# Altium PCB PCB.PcbDoc
Units mm, origin at the board's own origin, x right, y up, seen from the top; angles counter-clockwise.
Board outline 143.25 x 85.22 mm, 2 copper layers (Top Layer, Bottom Layer); 18 components, 25 nets, 77 pads, 0 vias.
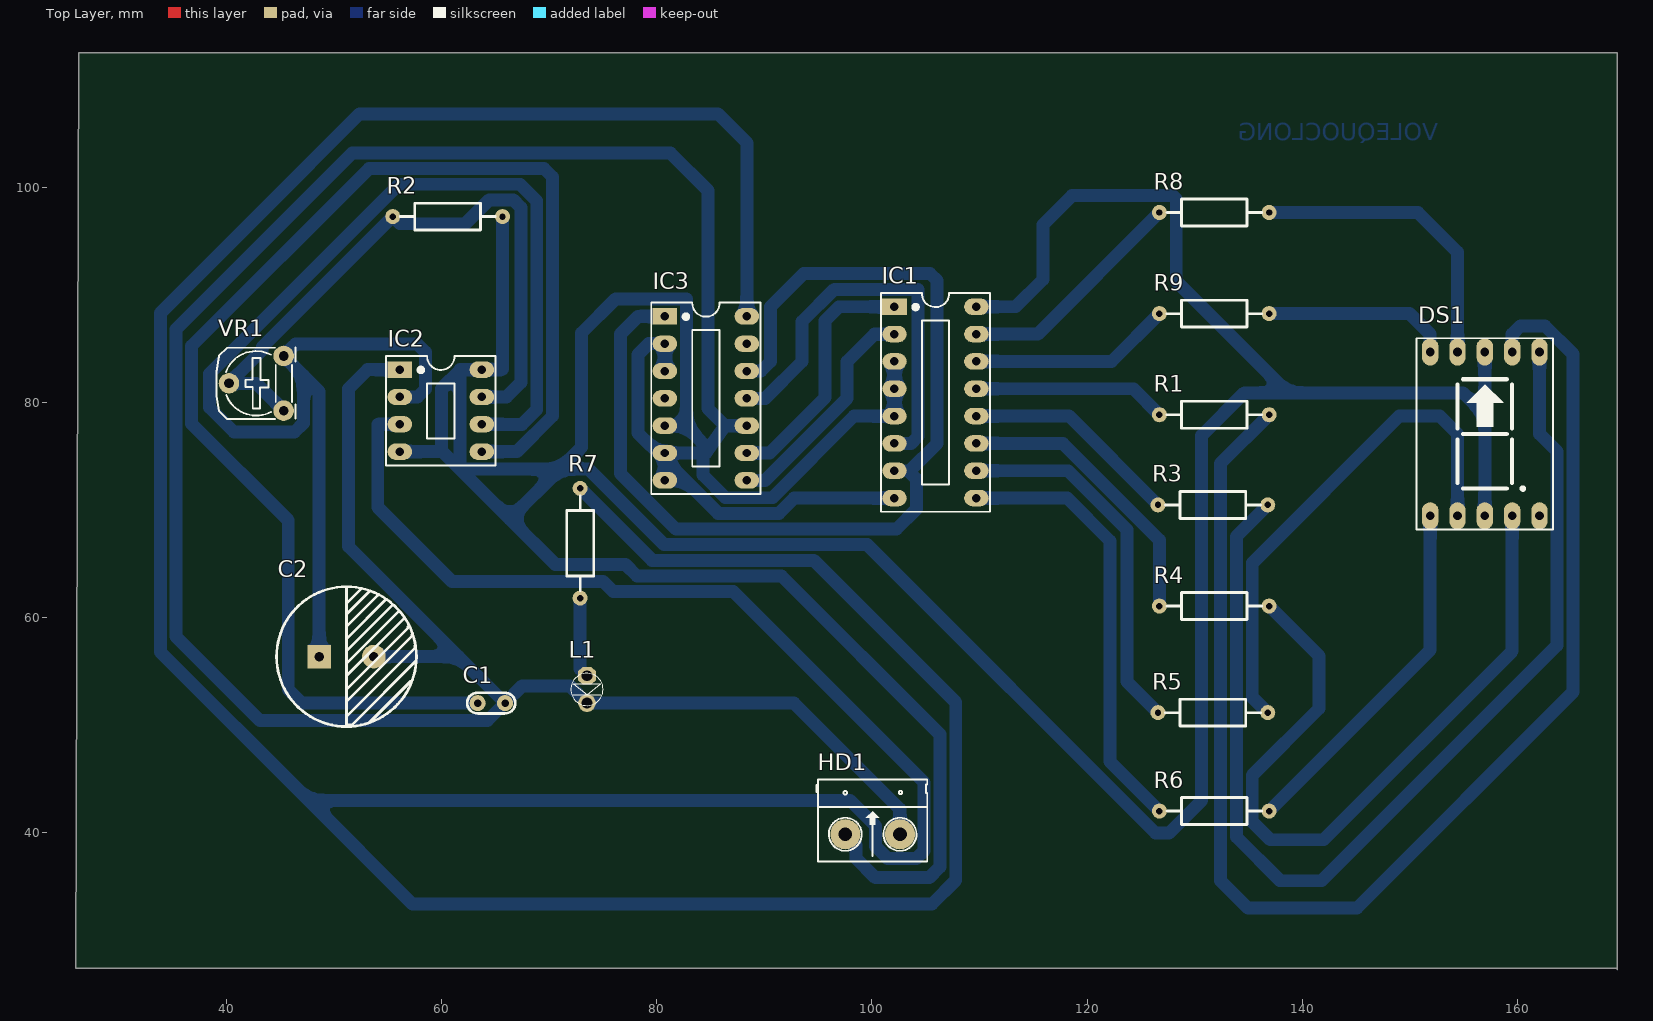
[diagram p0: Top Layer view]
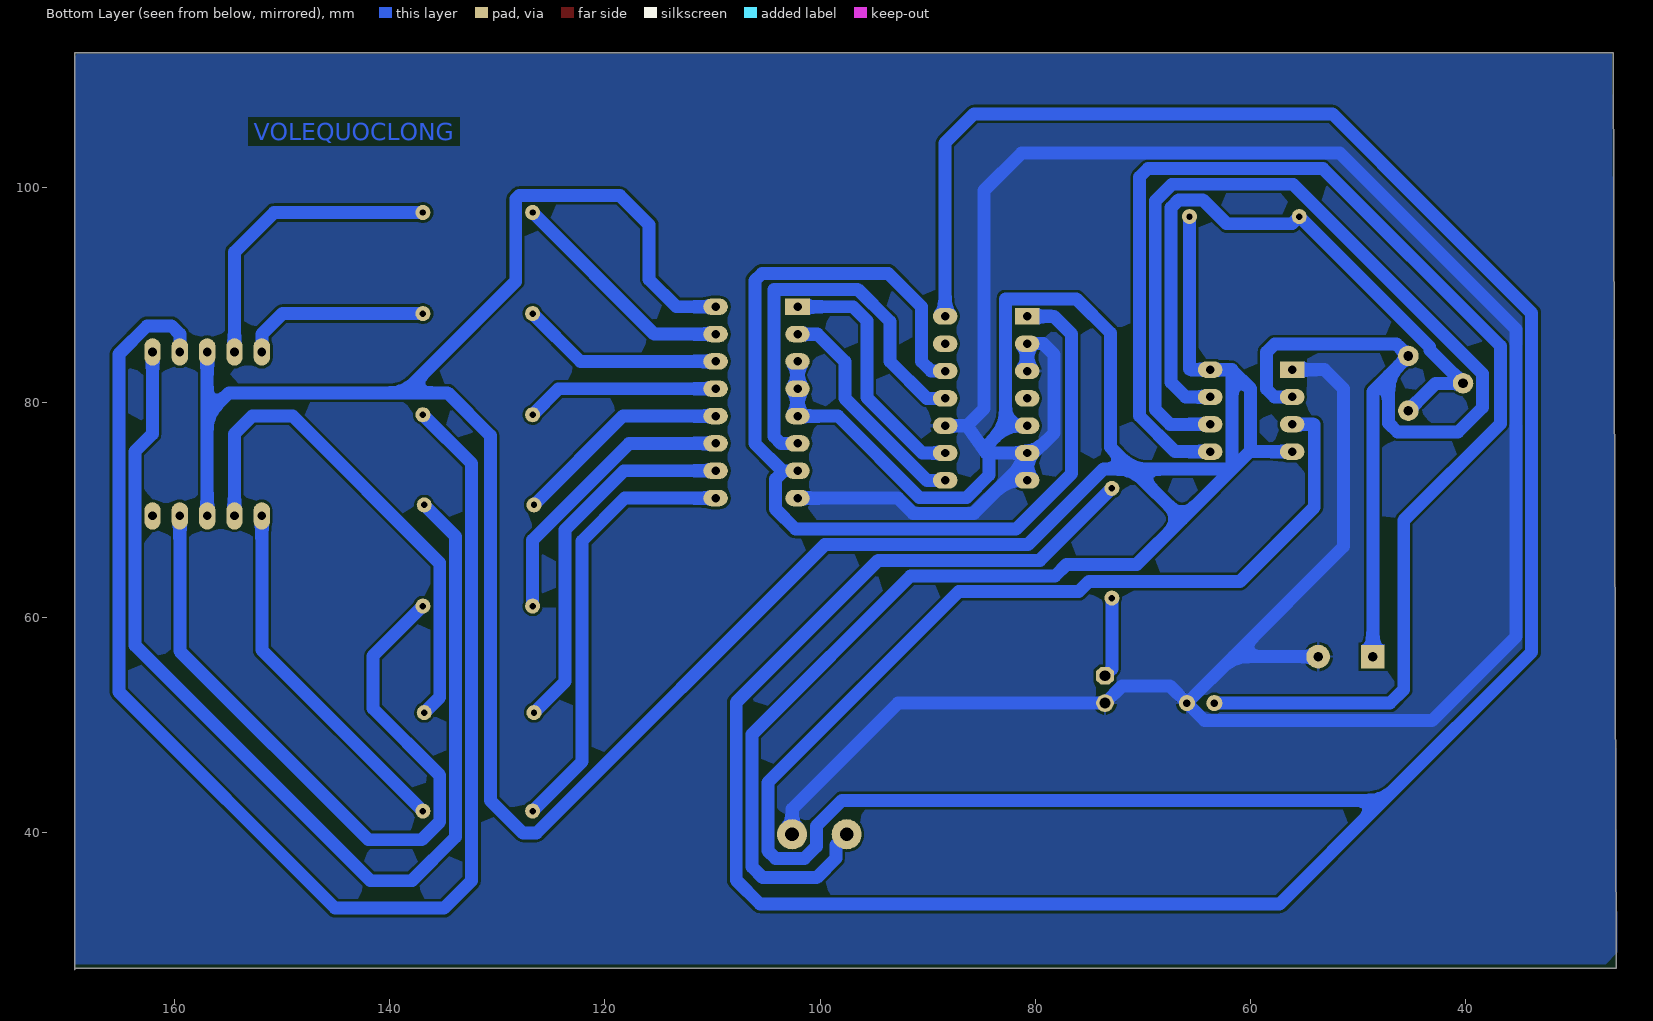
[diagram p1: Bottom Layer view, seen from below]
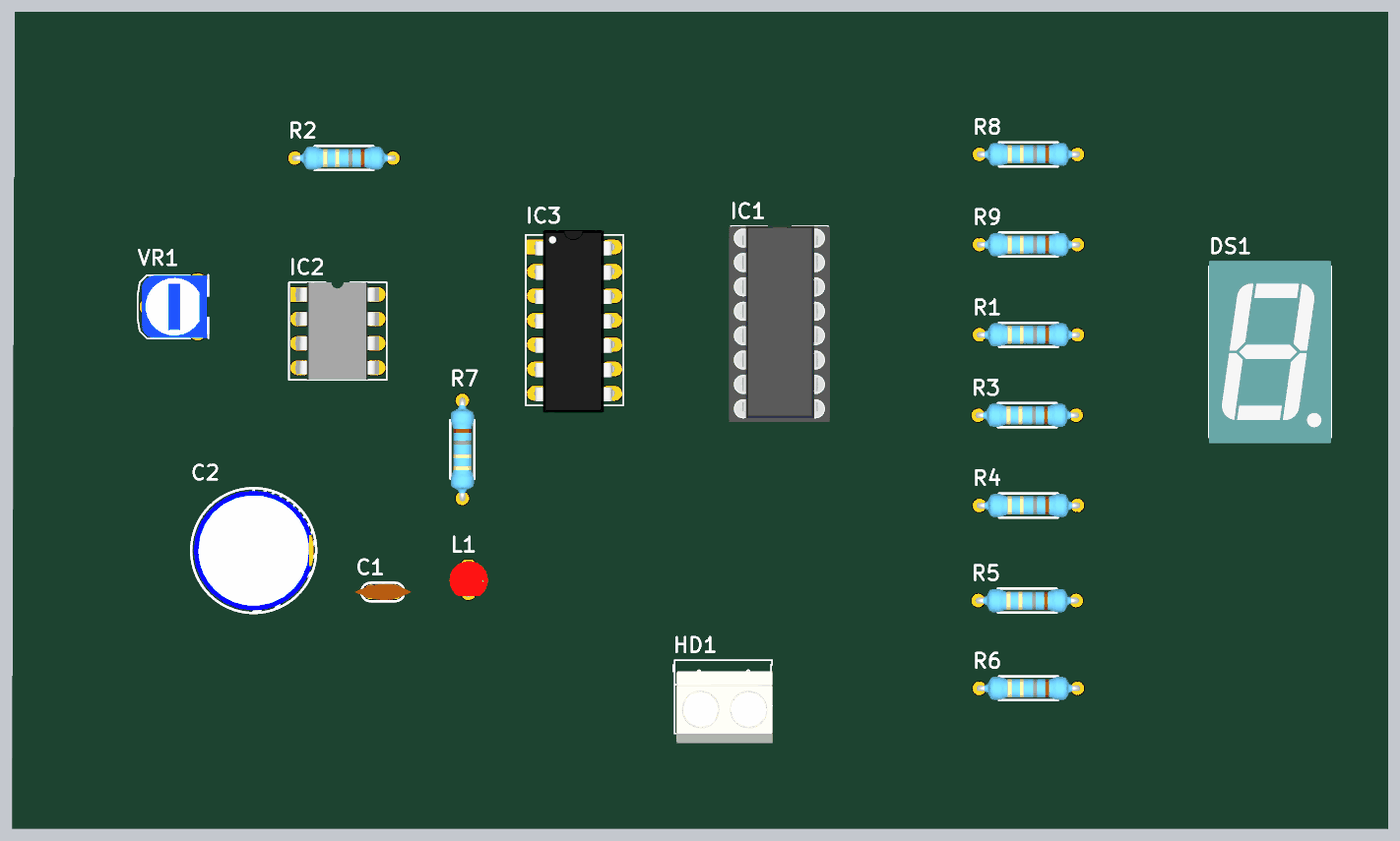
[diagram p2: 3D render of the assembled board from above, using the file's embedded part models]

## Layer stack, top to bottom
Top Solder: solder mask 0.0102, Solder Resist, Dk 3.5
Top Layer: signal copper 0.0356
Dielectric 1: dielectric 0.32, FR-4, Dk 4.8
Bottom Layer: signal copper 0.0356
Bottom Solder: solder mask 0.0102, Solder Resist, Dk 3.5

## Board outline
26.289,112.522 169.291,112.522 169.291,27.305 169.164,27.432 26.036,27.432

## Design rules (kind name [scope] priority, off if disabled: settings)
Clearance [All] p1: gap=0.254 ignorepadtopadclearanceinfootprint=FALSE
PolygonConnect [All] p1: connectstyle=Relief reliefconductorwidth=0.254 reliefentries=4 polygonreliefangle="90 Angle" airgapwidth=0.254
RoutingVias [All] p1: holewidth=0.711 width=1.27 viastyle="Through Hole" minholewidth=0.711 minwidth=1.27 maxholewidth=0.711 maxwidth=1.27
SolderMaskExpansion [All] p1: expansion=0.102 istentingtop=FALSE
SupplyNets "Schematic Supply Nets_1" [InNet('GND')] p1: voltage=0.000
SupplyNets "Schematic Supply Nets" [InNet('VCC')] p2: voltage=0.000
Width [All] p1: maxlimit=1.2 minlimit=1.2 preferedwidth=1.2
30 further rules are at their usual default settings.

## Components (designator, comment, footprint, x,y, rotation, side; value= is the part's Value field where it differs from the comment)
C1 "103" "tu gom" 64.643,52.07 r0 top
C2 "10uF" "tu hoa 13mm" 51.181,56.388 r0 top
DS1 "7SEG S" 7SEGS 151.892,69.469 r0 top value="LED 7S SEG"
HD1 "Header 2" HED2 97.536,39.878 r0 top
IC1 "7447" DIP16/W0.3 102.108,88.9 r270 top value="7447 , 74247"
IC2 "LM555" DIP8/W0.3 56.134,83.058 r270 top
IC3 "7490" DIP14/W0.3 80.772,88.011 r270 top
L1 "LED 3mm" LED-3MM-RED 73.533,54.61 r270 top
R1 "330R" "tro vach 1/4w" 131.826,78.867 r0 top
R2 "1k" "tro vach 1/4w" 60.579,97.282 r0 top
R3 "330R" "tro vach 1/4w" 131.699,70.485 r0 top
R4 "330R" "tro vach 1/4w" 131.826,61.087 r0 top
R5 "330R" "tro vach 1/4w" 131.699,51.181 r0 top
R6 "330R" "tro vach 1/4w" 131.826,42.037 r0 top
R7 "470R" "tro vach 1/4w" 72.898,66.929 r90 top
R8 "330R" "tro vach 1/4w" 131.826,97.663 r0 top
R9 "330R" "tro vach 1/4w" 131.826,88.265 r0 top
VR1 "100K" "Bien Tro Tam Giac Dung" 45.339,79.248 r90 top

## Footprints (in the part's own frame and the unit in brackets; to place one, negate y for a bottom-side part, rotate by r counter-clockwise, add the part's x,y. Pads: shape width x height; smd on the part's side, far side on the other; paste and mask are expansions set on the pad)
7SEGS [mil] "DIP 10 Leads; Body 12 x 15 mm; Pitch 0.5 mm"
  oval 60x100 hole 32: 1(0,0) 2(100,0) 3(200,0) 4(300,0) 5(400,0) 6(400,600) 7(300,600) 8(200,600) 9(100,600) 10(0,600)
  silkscreen extent -50,-50 450,650, body extent -50,-75 450,675, height 316
"Bien Tro Tam Giac Dung" [mil] "RM065"
  round 75 hole 35: 1(0,0) 2(100,200) 3(200,0)
  silkscreen extent -31,-44 231,246, body extent -28,-50 228,228, height 279
DIP8/W0.3 [mil] "8 PIN, W 300mil, Pin to pin 100mil"
  rect 60x90 hole 31: 1(0,0)
  oval 60x90 hole 31: 2(100,0) 3(200,0) 4(300,0) 5(300,300) 6(200,300) 7(100,300) 8(0,300)
  silkscreen extent -50,-50 350,350, body extent -50,-40 350,336, height 201
DIP14/W0.3 [mil] "14PIN, W 300mil, Pin to pin 100mil"
  rect 60x90 hole 31: 1(0,0)
  oval 60x90 hole 31: 2(100,0) 3(200,0) 4(300,0) 5(400,0) 6(500,0) 7(600,0) 8(600,300) 9(500,300) 10(400,300) 11(300,300) 12(200,300) 13(100,300) 14(0,300)
  silkscreen extent -50,-50 650,350, body extent -70,-12 680,302, height 145
DIP16/W0.3 [mil] "16 PIN, W 300mil, Pin to pin 100mil"
  rect 60x90 hole 31: 1(0,0)
  oval 60x90 hole 31: 2(100,0) 3(200,0) 4(300,0) 5(400,0) 6(500,0) 7(600,0) 8(700,0) 9(700,300) 10(600,300) 11(500,300) 12(400,300) 13(300,300) 14(200,300) 15(100,300) 16(0,300)
  silkscreen extent -50,-50 750,350, body extent -52,-57 752,356, height 299
HED2 [mil] "Header 2, 2 pin, hight 300mil, Pin to Pin 200, Colour Green"
  round 110 hole 50: 1(0,0) 2(200,0)
  silkscreen extent -106,-100 300,200, body extent -92,-140 302,155, height 394
LED-3MM-RED [mil]
  oct 65x65 hole 40: 1(0,0)
  round 65 hole 40: 2(100,0)
  silkscreen extent -9,-59 109,59, body extent -27,-77 117,80, height 181
"tro vach 1/4w" [mm]
  round 1.4 hole 0.6: 1(-5.1,0) 2(5.1,0)
  silkscreen extent -4.39,-1.25 4.42,1.25, body extent -5.38,-1.2 5.38,1.2, height 2.41
"tu gom" [mm] "Tu gom mini"
  round 1.5 hole 0.7: 1(-1.27,0) 2(1.27,0)
  silkscreen extent -2.25,-0.97 2.22,0.97, body extent -2.92,-0.85 2.92,0.85, height 6.12
"tu hoa 13mm" [mm]
  rect 2.2x2.2 hole 0.9: 1(-2.54,0)
  round 2.2 hole 0.9: 2(2.54,0)
  silkscreen extent -6.5,-6.5 6.5,6.5, body extent -6.25,-6.25 6.26,6.25, height 23.02

## Part data
C1: library part "Tu gom 103 50V", "Cắm", Chung_Loai=Cắm, Don_Vi=Con, Ma_Hang=MH000936, So_Chan=2, Ten_Linh_Kien="Tụ gốm 103 10nF 50V"
C2: library part "Tu Hoa 10uF 450V 13x20", "Cắm", Chung_Loai=Cắm, Don_Vi=Con, Ma_Hang=MH003950, So_Chan=2, Ten_Linh_Kien="Tụ Hóa 10uF 450V 13x20MM"
DS1: library part LED7S, "Single 7 Seg Dipslay"
HD1: library part Hed2, "Header 2 (Green)"
IC1: "BCD to 7-Segment Decoder/Driver"
IC2: "Timer"
IC3: "4-Bit Decade Counter"
L1: library part "LED 3mm Do", "Cắm", Chung_Loai=Cắm, Don_Vi=Con, Ma_Hang=MH003892, Ten_Linh_Kien="Led 3MM Phủ Đỏ (10c)"
R1 R3 R4 R5 R6 R8 R9: library part "Tro Vach 1/4W 1% 330R", "Cắm", Chung_Loai=Cắm, Don_Vi=Con, Ma_Hang=MH006348, So_Chan=2, Ten_Linh_Kien="Trở Vạch 1/4w 1% 330R"
R2: library part "Tro Vach 1/4W 5% 1k", "Cắm", Chung_Loai=Cắm, Don_Vi=Con, Ma_Hang=MH007390, So_Chan=2, Ten_Linh_Kien="Trở Vạch 1/4w 5% 1k"
R7: library part "Tro Vach 1/4W 5% 470R", "Cắm", Chung_Loai=Cắm, Don_Vi=Con, Ma_Hang=MH007320, So_Chan=2, Ten_Linh_Kien="Trở Vạch 1/4w 5% 470R"
VR1: library part "Bien tro tam giac 100K Dung", "Cắm", Chung_Loai=Cắm, Don_Vi=Con, Ma_Hang=MH003711, Ten_Linh_Kien="Biến Trở Tam Giác 104-100K RM065"

## Nets (pads, with @x,y where several pads share a name; then routed paths per layer and width w, separated by ;. In a path a pad name is that pad's centre, name@x,y a point inside that pad or via, vN(x,y) a via of type N, cw(c..) or ccw(c..) an arc to the next point about the centre after c; other vN are vias at no path point)
GND: C1.2 C2.2 HD1.2 IC1.8 IC2.1 IC3.2 IC3.3 IC3.6 IC3.7 IC3.10 L1.2 | length 290
  Bottom Layer w1.2: C2.2 61.595,56.388 ; IC2.1 53.137,83.058 51.359,81.28 51.359,66.624 61.595,56.388 ; IC3.3 IC3.2 79.273,85.471 78.257,84.455 78.257,77.169 IC3.6@80.772,74.654 ; IC3.10 86.36,77.851 ; IC1.8 92.786,71.12 91.367,69.701 85.725,69.701 82.655,72.771 ; HD1.2 102.616,42.208 92.754,52.07 L1.2 71.933,53.67 67.513,53.67 C1.2 ; 61.595,56.388 C1.2 ; C1.2 64.287,50.444 43.129,50.444 35.333,58.241 35.333,86.814 51.717,103.198 81.28,103.198 84.76,99.718 84.76,79.451 86.36,77.851 ; IC3.6@80.772,74.654 IC3.6 84.582,75.311 86.36,77.851 ; IC3.6@80.772,74.654 82.655,72.771 ; IC3.6@80.772,74.654 IC3.7 82.655,72.771
NetC1_1: C1.1 IC2.5 | length 124.6
  Bottom Layer w1.2: C1.1 47.041,52.07 45.771,53.34 45.771,69.049 36.787,78.033 36.787,85.248 53.283,101.744 69.538,101.744 70.317,100.965 70.317,78.74 67.015,75.438 IC2.5
NetC2_1: C2.1 IC2.2 IC2.6 VR1.3 | length 130.4
  Bottom Layer w1.2: C2.1 48.641,81.026 47.168,82.499 ; IC2.2 57.785,80.518 58.522,81.255 58.522,84.684 57.76,85.446 46.457,85.446 VR1.3 47.168,82.499 ; IC2.6 67.488,77.978 68.863,79.353 68.863,98.737 67.31,100.29 56.069,100.29 38.453,82.674 38.453,79.531 40.716,77.267 46.355,77.267 47.168,78.08 47.168,82.499
NetDS1_1: DS1.1 R6.2 | length 33.6
  Bottom Layer w1.2: R6.2 151.892,57.003 DS1.1
NetDS1_2: DS1.2 R5.2 | length 47.5
  Bottom Layer w1.2: R5.2 135.357,52.623 135.357,65.075 149.022,78.74 152.781,78.74 154.432,77.089 DS1.2
NetDS1_4: DS1.4 R4.2 | length 69.2
  Bottom Layer w1.2: R4.2 141.554,56.459 141.554,51.562 135.357,45.364 135.357,41.046 137.033,39.37 141.986,39.37 159.512,56.896 DS1.4
NetDS1_6: DS1.6 R3.2 | length 100.5
  Bottom Layer w1.2: R3.2 133.883,67.569 133.883,39.628 137.952,35.56 141.797,35.56 163.678,57.44 163.678,75.463 162.052,77.089 DS1.6
NetDS1_7: DS1.7 R1.2 | length 127.4
  Bottom Layer w1.2: R1.2 132.41,74.351 132.41,35.56 134.95,33.02 145.085,33.02 165.151,53.086 165.151,84.531 162.56,87.122 160.274,87.122 159.512,86.36 DS1.7
NetDS1_9: DS1.9 R8.2 | length 28.3
  Bottom Layer w1.2: R8.2 150.749,97.663 154.432,93.98 DS1.9
NetDS1_10: DS1.10 R9.2 | length 17.4
  Bottom Layer w1.2: R9.2 149.987,88.265 151.892,86.36 DS1.10
NetIC1_1: IC1.1 IC3.9 | length 23.5
  Bottom Layer w1.2: IC3.9 90.513,75.311 95.656,80.454 95.656,87.605 96.952,88.9 IC1.1
NetIC1_2: IC1.2 IC3.8 | length 21.3
  Bottom Layer w1.2: IC3.8 90.088,72.771 97.714,80.397 97.714,83.82 100.254,86.36 IC1.2
NetIC1_6: IC1.6 IC3.11 | length 38.4
  Bottom Layer w1.2: IC3.11 90.094,80.391 93.523,83.82 93.523,87.528 96.52,90.526 104.292,90.526 104.292,76.835 103.657,76.2 IC1.6
NetIC1_7: IC1.7 IC3.1 IC3.12 | length 96.9
  Bottom Layer w1.2: IC3.1 78.283,88.011 76.632,86.36 76.632,73.406 81.791,68.247 102.296,68.247 104.14,70.091 104.14,72.898 103.378,73.66 ; IC3.12 89.687,82.931 90.576,83.82 90.576,88.9 93.675,91.999 105.41,91.999 106.07,91.338 106.07,76.2 103.53,73.66 103.378,73.66 ; IC1.7 103.378,73.66
NetIC1_9: IC1.9 R6.1 | length 41.1
  Bottom Layer w1.2: IC1.9 118.161,71.12 122.137,67.144 122.137,46.626 R6.1
NetIC1_10: IC1.10 R5.1 | length 34.5
  Bottom Layer w1.2: IC1.10 118.237,73.66 123.718,68.179 123.718,54.062 R5.1
NetIC1_11: IC1.11 R4.1 | length 26.9
  Bottom Layer w1.2: IC1.11 117.754,76.2 126.726,67.228 R4.1
NetIC1_12: IC1.12 R3.1 | length 20.3
  Bottom Layer w1.2: IC1.12 118.344,78.74 R3.1
NetIC1_13: IC1.13 R1.1 | length 18
  Bottom Layer w1.2: IC1.13 124.313,81.28 R1.1
NetIC1_14: IC1.14 R9.1 | length 18.8
  Bottom Layer w1.2: IC1.14 122.281,83.82 R9.1
NetIC1_15: IC1.15 R8.1 | length 21.7
  Bottom Layer w1.2: IC1.15 115.423,86.36 R8.1
NetIC2_3: IC2.3 IC3.14 R7.2 | length 393.4
  Bottom Layer w1.2: IC2.3 54.086,77.978 54.086,70.272 60.975,63.383 75.023,63.383 75.975,62.431 87.127,62.431 104.867,44.691 104.867,38.344 104.14,37.617 101.473,37.617 100.355,38.735 100.355,40.64 97.968,43.028 47.676,43.028 ; R7.2 79.588,65.339 94.605,65.339 107.798,52.146 107.798,35.611 105.588,33.401 57.302,33.401 47.676,43.028 ; IC3.14 88.392,93.624 88.392,104.14 85.725,106.807 52.375,106.807 43.253,97.685 33.879,88.311 33.879,56.825 47.676,43.028
NetIC2_7: IC2.7 R2.1 VR1.1 VR1.2 | length 61.8
  Bottom Layer w1.2: VR1.1 42.799,81.788 VR1.2 43.353,84.882 43.353,85.156 R2.1 56.146,96.615 62.23,96.615 64.451,98.836 66.675,98.836 67.386,98.125 67.386,81.864 66.04,80.518 IC2.7
NetL1_1: L1.1 R7.1 | length 7.5
  Bottom Layer w1.2: R7.1 72.898,55.245 L1.1
VCC: DS1.3 DS1.8 HD1.1 IC1.3 IC1.4 IC1.5 IC1.16 IC2.4 IC2.8 IC3.5 R2.2 | length 408.1
  Bottom Layer w1.2: IC2.4 59.995,75.438 ; R2.2 65.679,83.129 65.608,83.058 IC2.8 61.773,83.058 ; IC3.5 82.779,77.851 ; HD1.1 98.53,38.884 98.53,37.647 100.33,35.846 105.337,35.846 106.321,36.83 106.321,49.178 91.614,63.885 78.175,63.885 77.093,64.967 70.579,64.967 66.363,69.183 ; IC1.3 IC1.4 IC1.5 98.349,78.74 90.764,71.155 86.411,71.155 84.303,73.263 84.303,76.2 82.779,77.851 ; IC1.16 113.36,88.9 115.9,91.44 115.9,96.52 118.618,99.238 127.965,99.238 128.295,98.908 128.295,91.262 138.659,80.899 ; DS1.3 156.972,78.867 ; DS1.8 156.972,78.867 ; 59.995,75.438 60.108,75.438 66.363,69.183 ; 59.995,75.438 59.995,81.28 61.747,83.033 ; 61.747,83.033 61.773,83.058 ; 61.747,83.033 61.747,83.058 61.773,83.058 ; 61.747,83.033 61.747,73.812 70.993,73.812 ; 66.363,69.183 70.993,73.812 ; 70.993,73.812 73.025,75.844 73.025,86.462 76.2,89.637 82.779,89.637 82.779,77.851 ; 70.993,73.812 73.685,73.812 80.705,66.793 99.577,66.793 126.365,40.005 127.635,40.005 130.651,43.021 130.651,76.93 134.62,80.899 138.659,80.899 ; 138.659,80.899 154.94,80.899 156.972,78.867
pads on no net: DS1.5 IC3.4 IC3.13

## Polygon pours and split planes (outlines as drawn)
GND on Bottom Layer "GND_L02_P000" (solid, pour order 0): 26.416,112.395 169.037,112.395 169.291,112.141 169.291,27.813 26.162,27.813 25.908,28.067

## Other copper
Bottom Layer:
  text "VOLEQUOCLONG" at 152.654,104.394 h1.6